# EAGLE board ME433 (EAGLE 8.1.0)
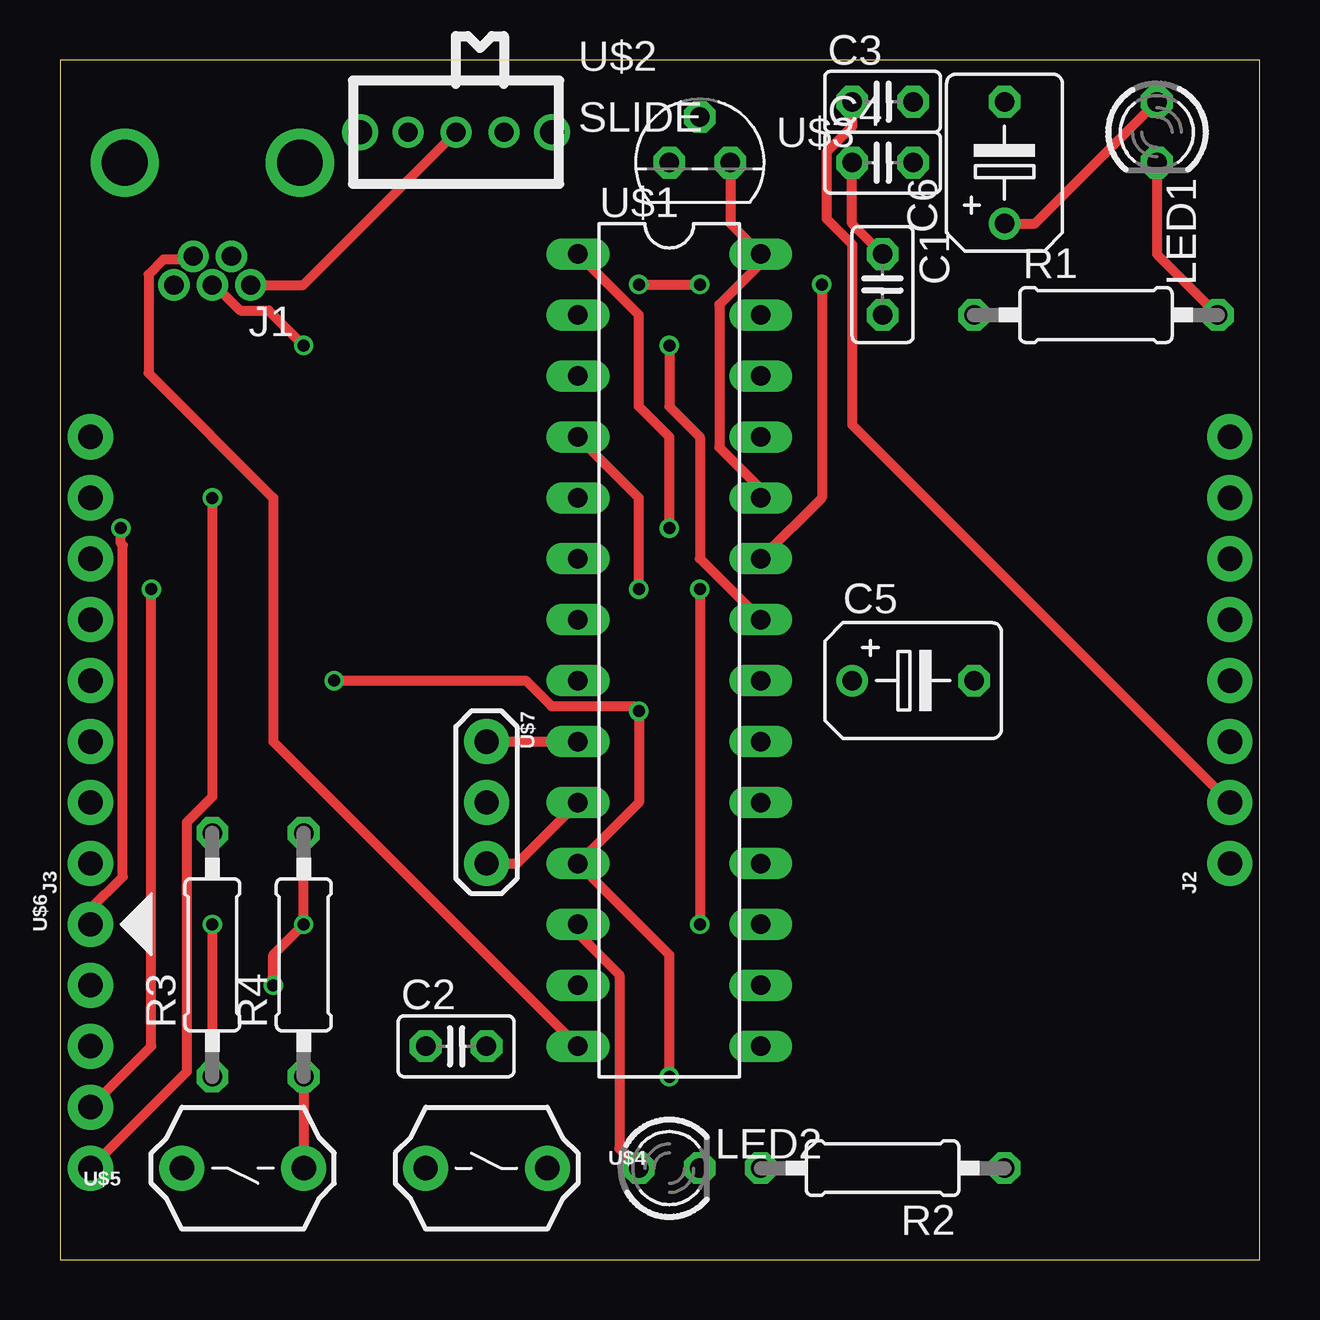
[diagram p0: board, top side]
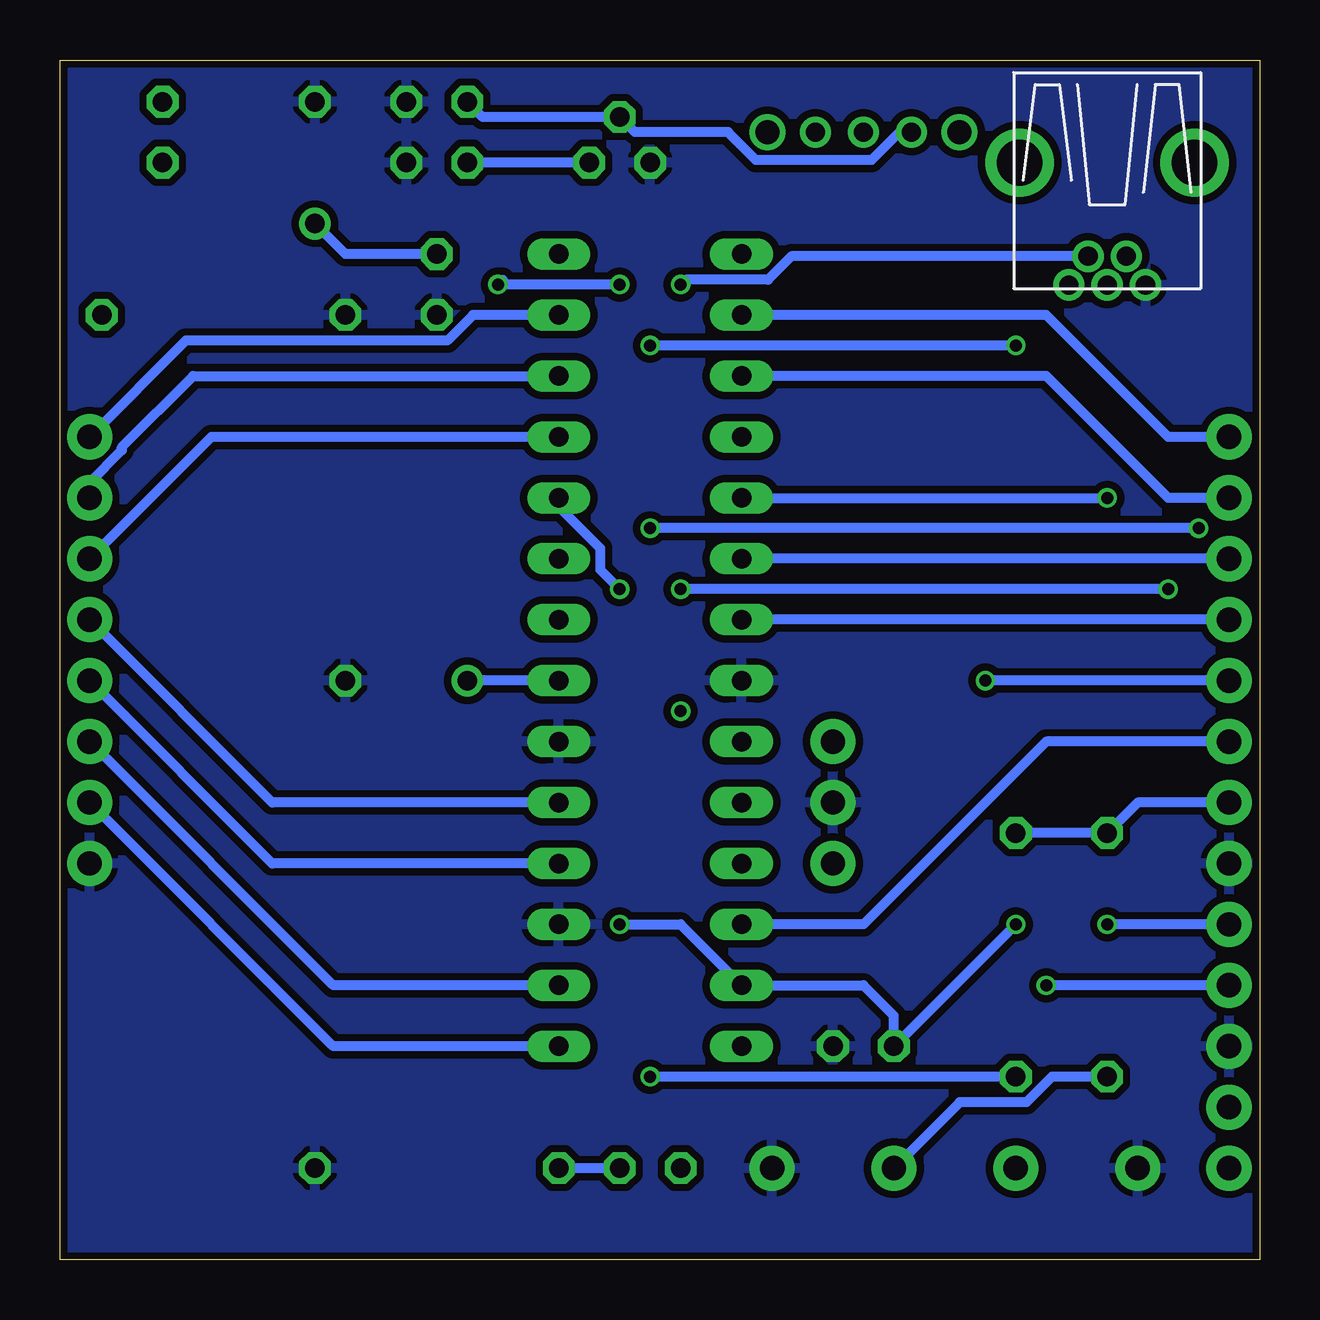
[diagram p1: board, bottom side, seen from below]

Size 50 x 50 mm. Coordinates in mm from the lower left corner, seen from the top.
Outline: 0,0 50,0 50,50 0,50 0,0
Copper layers (1*16): Top 0.035mm / dielectric 1.5mm / Bottom 0.035mm
Design rules "SeeedStudio_2layer_DRU_no_angle_20140221": minimum track width 6mil, minimum drill 12mil, track to track 6mil, track to pad 6mil, pad to pad 6mil, via to via 6mil, smd to smd 0mil, copper to edge 10mil, drill to drill 10mil, minimum pad ring 10mil, minimum via ring 6mil, stop-mask expansion 2mil, vias tented up to drill 100mil, thermal gap 10mil

## Footprints (pad centres in the part's own frame; a part is rotated, then mirrored left to right if it is on the bottom)
C025-025X050 = drill 0.813 octagon: 1 -1.27,0; 2 1.27,0
B45181B = drill 0.813: + -2.54,0 | drill 0.813 octagon: - 2.54,0
USB-MB-H = drill 0.8: D+ 5.1,0; D- 3.9,0.8; GND 5.1,-1.6; ID 3.9,-0.8; VBUS 5.1,1.6 | drill 1.9: P$6 0,-3.65; P$7 0,3.65
1X08 = drill 1.016 pad 1.88: 1 0,0; 2 2.54,0; 3 5.08,0; 4 7.62,0; 5 10.16,0; 6 12.7,0; 7 15.24,0; 8 17.78,0
LED3MM = drill 0.813 octagon: A -1.27,0; K 1.27,0
0207/10 = drill 0.813 octagon: 1 -5.08,0; 2 5.08,0
DIL28-3 = drill 0.813 long: 1 -16.51,-3.81; 2 -13.97,-3.81; 3 -11.43,-3.81; 4 -8.89,-3.81; 5 -6.35,-3.81; 6 -3.81,-3.81; 7 -1.27,-3.81; 8 1.27,-3.81; 9 3.81,-3.81; 10 6.35,-3.81; 11 8.89,-3.81; 12 11.43,-3.81; 13 13.97,-3.81; 14 16.51,-3.81; 15 16.51,3.81; 16 13.97,3.81; 17 11.43,3.81; 18 8.89,3.81; 19 6.35,3.81; 20 3.81,3.81; 21 1.27,3.81; 22 -1.27,3.81; 23 -3.81,3.81; 24 -6.35,3.81; 25 -8.89,3.81; 26 -11.43,3.81; 27 -13.97,3.81; 28 -16.51,3.81
SLIDE = drill 0.8: 1 -2,0; 2 0,0; 3 2,0 | drill 1: P$1 -4,0; P$2 4,0
TO92 = drill 0.813 octagon: 1 -1.27,0; 2 0,1.905; 3 1.27,0
PB = drill 1.016 pad 1.88: 1 -2.54,0; 2 2.54,0
1X05 = drill 1.016 pad 1.88: 1 0,0; 2 2.54,0; 3 5.08,0; 4 7.62,0; 5 10.16,0
OSC = drill 1.016 pad 1.88: 1 -2.54,0; 2 0,0; 3 2.54,0

## Placement (x,y rotation side)
C1  0.1  [C025-025X050]  34.29,40.64 270 top
C2  0.1  [C025-025X050]  16.51,8.89 0 top
C3  0.1  [C025-025X050]  34.29,48.26 0 top
C4  0.1  [C025-025X050]  34.29,45.72 0 top
C5  10  [B45181B]  35.56,24.13 0 top
C6  10  [B45181B]  39.37,45.72 90 top
J1  USB-MB-H  [USB-MB-H]  6.35,45.72 270 top
J2  [1X08]  48.77,16.51 90 top
J3  [1X08]  1.27,16.51 90 top
LED1  Red  [LED3MM]  45.72,46.99 270 top
LED2  Green  [LED3MM]  25.4,3.81 0 top
R1  330  [0207/10]  43.18,39.37 0 top
R2  330  [0207/10]  34.29,3.81 180 top
R3  10k  [0207/10]  6.35,12.7 90 top
R4  10k  [0207/10]  10.16,12.7 90 top
U$1  PIC32MX250F128B  [DIL28-3]  25.4,25.4 270 top
U$2  SLIDE  [SLIDE]  16.51,46.99 0 top
U$3  MCP1702  [TO92]  26.67,45.72 0 top
U$4  RESET  [PB]  17.78,3.81 0 top
U$5  USER  [PB]  7.62,3.81 180 top
U$6  PICKIT3  [1X05]  1.27,13.97 270 top
U$7  8MHz  [OSC]  17.78,19.05 270 top

## Library data of the parts
C1-C6 J1 LED1 LED2 R1-R4 U$1-U$7 = ME433
J2 J3 = ME433; PROD_ID: CONN-08438

## Nets
+3V3: C1.1 C2.1 C4.1 C6.+ J3.2 LED1.A R3.2 R4.2 U$1.13 U$1.24 U$1.28 U$3.3 U$6.2
+5V: C3.1 J2.2 U$1.15 U$2.1 U$3.2
A0: J3.8 U$1.2
A1: J3.7 U$1.3
A4/LED: J3.3 LED2.A U$1.12
B2: J3.6 U$1.6
B3: J3.5 U$1.7
B4/USER: J3.4 R4.1 U$1.11 U$5.1
B7: J2.3 U$1.16
B8: J2.4 U$1.18
B9: J2.5 U$1.19
B13: J2.6 U$1.25
B14: J2.7 U$1.26
B15: J2.8 U$1.27
D+: J1.D+ U$1.22
D-: J1.D- U$1.23
GND: C1.2 C2.2 C3.2 C4.2 C5.- C6.- J1.GND J2.1 J3.1 R1.1 R2.1 U$1.8 U$1.17 U$1.20 U$3.1 U$4.2 U$5.2 U$6.3 U$7.2
MCLR: R3.1 U$1.1 U$4.1 U$6.1
N$1: J1.VBUS U$2.2
N$2: LED2.K R2.2
N$3: LED1.K R1.2
N$4: U$1.9 U$7.1
N$5: U$1.10 U$7.3
N$7: C5.+ U$1.21
PGC: U$1.5 U$6.5
PGD: U$1.4 U$6.4
USBID: J1.ID U$1.14

## Tracks (layer width: path | path; a pad name or v marks a point on that pad's centre or on a via)
+3V3  (via drill 0.5)
  Top 0.406: C6.+ 40.64,43.18 LED1.A | U$3.3 27.94,43.18 U$1.28 29.21,41.54 27.48,39.81 27.48,33.85 29.21,32.12 U$1.24 | C4.1 33.02,43.18 C1.1 | R4.2 v10.16,13.97 8.89,12.7 v8.89,11.43 | v26.67,27.94 v26.67,13.97
  Bottom 0.406: J3.2 5.08,19.05 R3.2 R4.2 | U$3.3 C4.1 | C1.1 38.1,41.91 C6.+ | v10.16,13.97 C2.1 15.24,10.16 16.51,11.43 U$1.13 | U$1.13 21.59,11.8 | U$6.2 v8.89,11.43 | v26.67,27.94 27.48,28.75 27.48,29.65 29.21,31.38 U$1.24 | v26.67,13.97 24.13,13.97 U$1.13
+5V
  Top 0.406: J2.2 33.02,34.8 33.02,42.32 31.95,43.38 31.95,46.16 33.02,47.23 C3.1
  Bottom 0.406: U$1.15 38.61,8.89 J2.2 | U$2.1 15.01,46.99 16.17,45.83 20.99,45.83 22.15,46.99 26.04,46.99 U$3.2 32.38,47.62 C3.1
A0
  Bottom 0.406: J3.8 3.81,34.29 8.89,39.37 U$1.2
A1
  Bottom 0.406: J3.7 3.81,31.75 8.89,36.83 U$1.3
A4/LED
  Top 0.406: U$1.12 21.59,13.6 23.32,11.87 23.32,4.62 LED2.A
  Bottom 0.406: J3.3 8.89,21.59 16.51,13.97 U$1.12
B2
  Bottom 0.406: J3.6 U$1.6
B3
  Bottom 0.406: J3.5 U$1.7
B4/USER  (via drill 0.5)
  Top 0.406: R4.1 U$5.1 | v25.4,7.62 25.4,12.7 U$1.11 24.13,19.05 v24.13,22.86 23.93,23.06 20.49,23.06 19.42,24.13 v11.43,24.13
  Bottom 0.406: J3.4 v11.43,24.13 | R4.1 v25.4,7.62
B7
  Bottom 0.406: U$1.16 38.61,11.43 J2.3
B8
  Bottom 0.406: U$1.18 41.15,16.51 J2.4
B9
  Bottom 0.406: U$1.19 41.15,19.05 J2.5
B13
  Bottom 0.406: U$1.25 43.69,34.29 J2.6
B14
  Bottom 0.406: J2.7 48.77,32.39 47.42,33.73 47.42,33.86 44.45,36.83 U$1.26
B15
  Bottom 0.406: 48.26,34.29 J2.8 44.76,38.3 33.85,38.3 32.78,39.37 U$1.27
D+  (via drill 0.5)
  Top 0.406: J1.D+ 6.45,40.62 7.51,39.56 8.7,39.56 v10.16,38.1 | v25.4,38.1 25.4,35.56 26.67,34.29 26.67,29.21 U$1.22
  Bottom 0.406: v10.16,38.1 v25.4,38.1
D-  (via drill 0.5)
  Top 0.406: v31.75,40.64 31.75,31.75 U$1.23 | v24.13,40.64 v26.67,40.64
  Bottom 0.406: J1.D- 19.51,41.82 20.49,40.84 23.93,40.84 v24.13,40.64 | 31.55,40.84 v31.75,40.64 v26.67,40.64
GND
  pour Bottom (isolate 0.305): 0,49.53 49.53,49.53 49.53,0 0,0
MCLR  (via drill 0.5)
  Top 0.406: U$6.1 1.27,14.61 2.62,15.95 2.62,29.77 2.54,29.84 v2.54,30.48 | v6.35,13.97 R3.1 | v25.4,30.48 25.4,34.29 24.13,35.56 24.13,39.37 U$1.1
  Bottom 0.406: v2.54,30.48 v25.4,30.48 | U$6.1 v6.35,13.97 | R3.1 8.65,7.62 9.72,6.55 12.5,6.55 U$4.1
N$1
  Top 0.406: J1.VBUS 10.14,40.62 U$2.2
N$2
  Bottom 0.406: LED2.K R2.2
N$3
  Top 0.406: LED1.K 45.72,41.91 R1.2
N$4
  Top 0.406: U$7.1 U$1.9
N$5
  Top 0.406: U$7.3 19.05,16.51 U$1.10
N$7
  Bottom 0.406: U$1.21 C5.+
PGC  (via drill 0.5)
  Top 0.406: U$6.5 5.28,7.82 5.28,18.22 6.35,19.29 v6.35,31.75
  Bottom 0.406: U$1.5 v6.35,31.75
PGD  (via drill 0.5)
  Top 0.406: U$6.4 3.81,8.89 v3.81,27.94 | v24.13,27.94 24.13,31.75 U$1.4
  Bottom 0.406: v3.81,27.94 v24.13,27.94
USBID
  Top 0.406: J1.ID 5.41,41.68 4.31,41.68 3.69,41.06 3.69,36.95 8.89,31.75 8.89,21.59 U$1.14